# Altium PCB STM32board_pcb.PcbDoc
Units mm, origin at the board's own origin, x right, y up, seen from the top; angles counter-clockwise.
Board outline 33.5 x 33.5 mm, 4 copper layers (L1 (Signal), L2 (GND), L3 (GND), L4 (Signal)), stack 1.57 mm thick; 35 components, 27 nets, 170 pads, 67 vias.
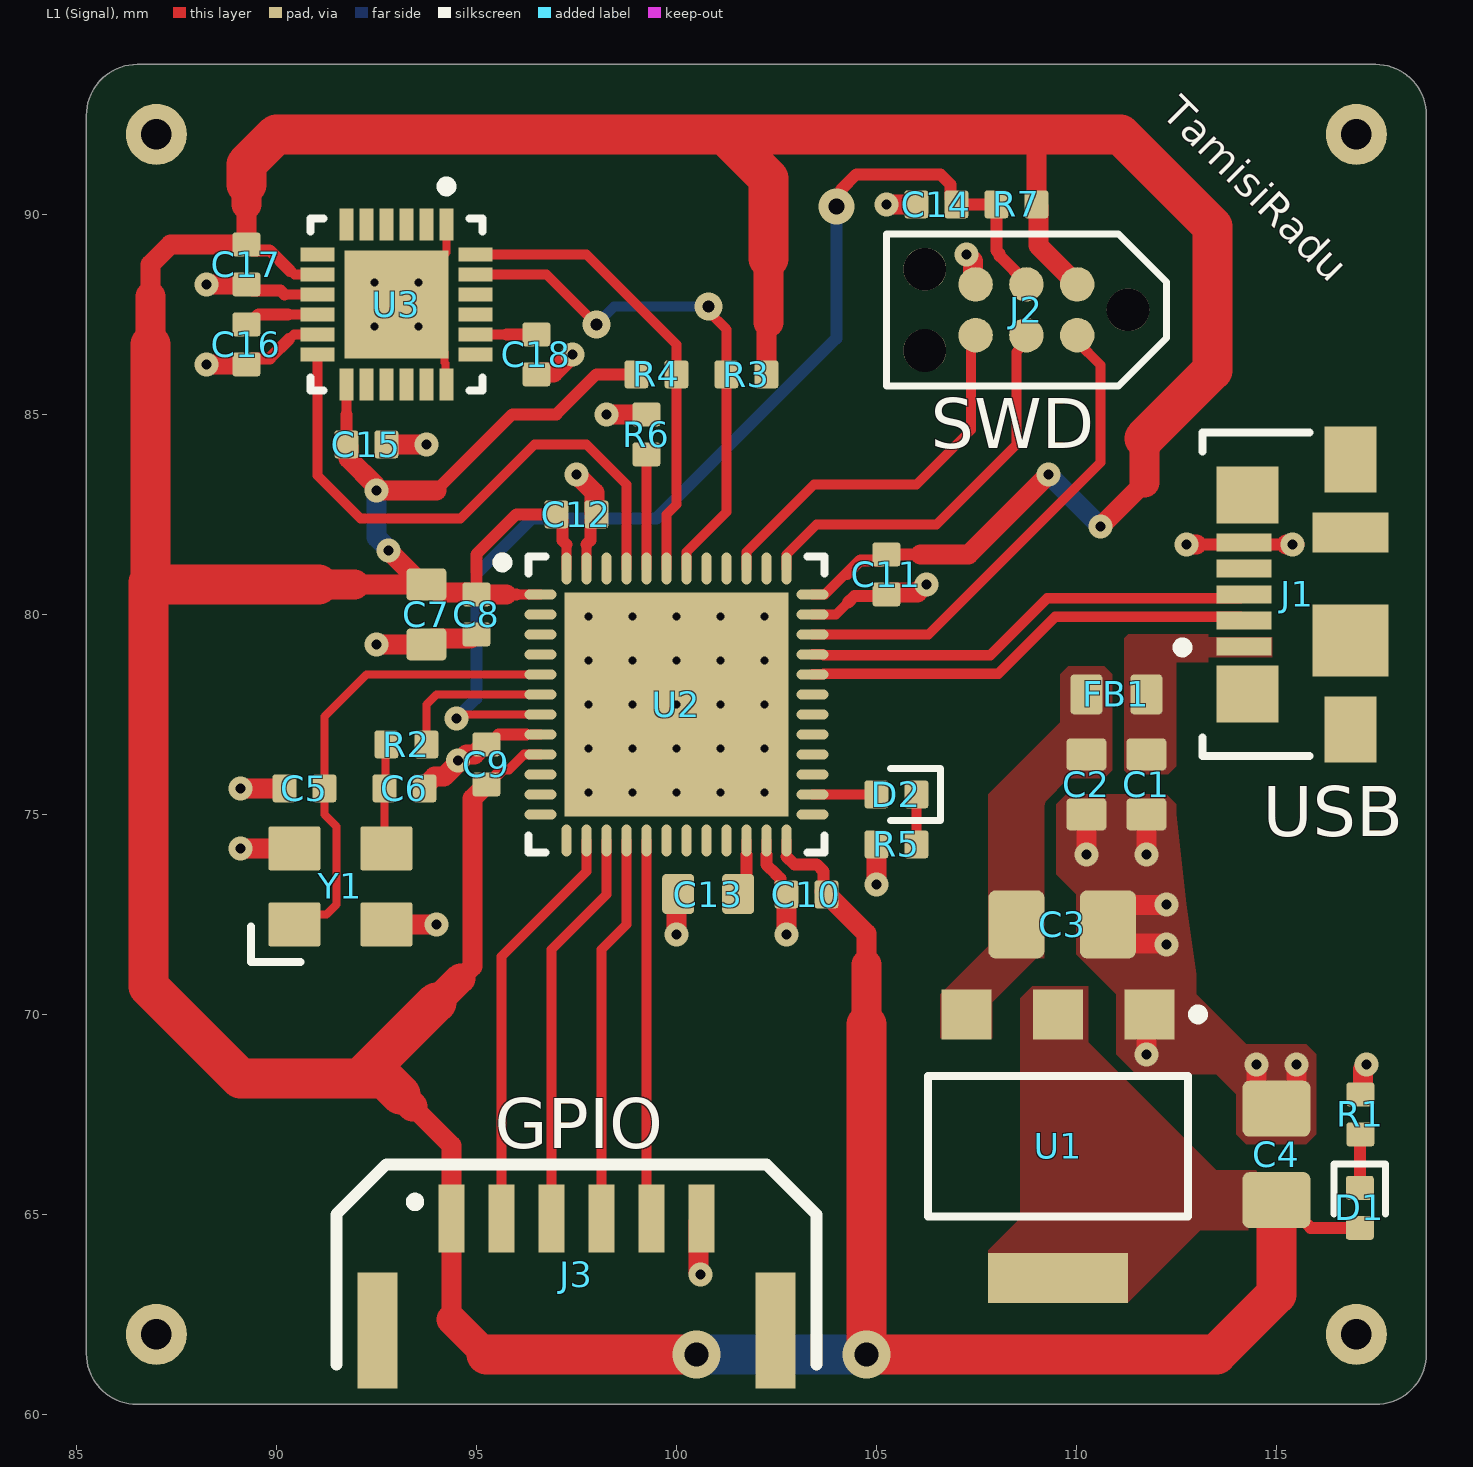
[diagram p0: L1 (Signal) view]
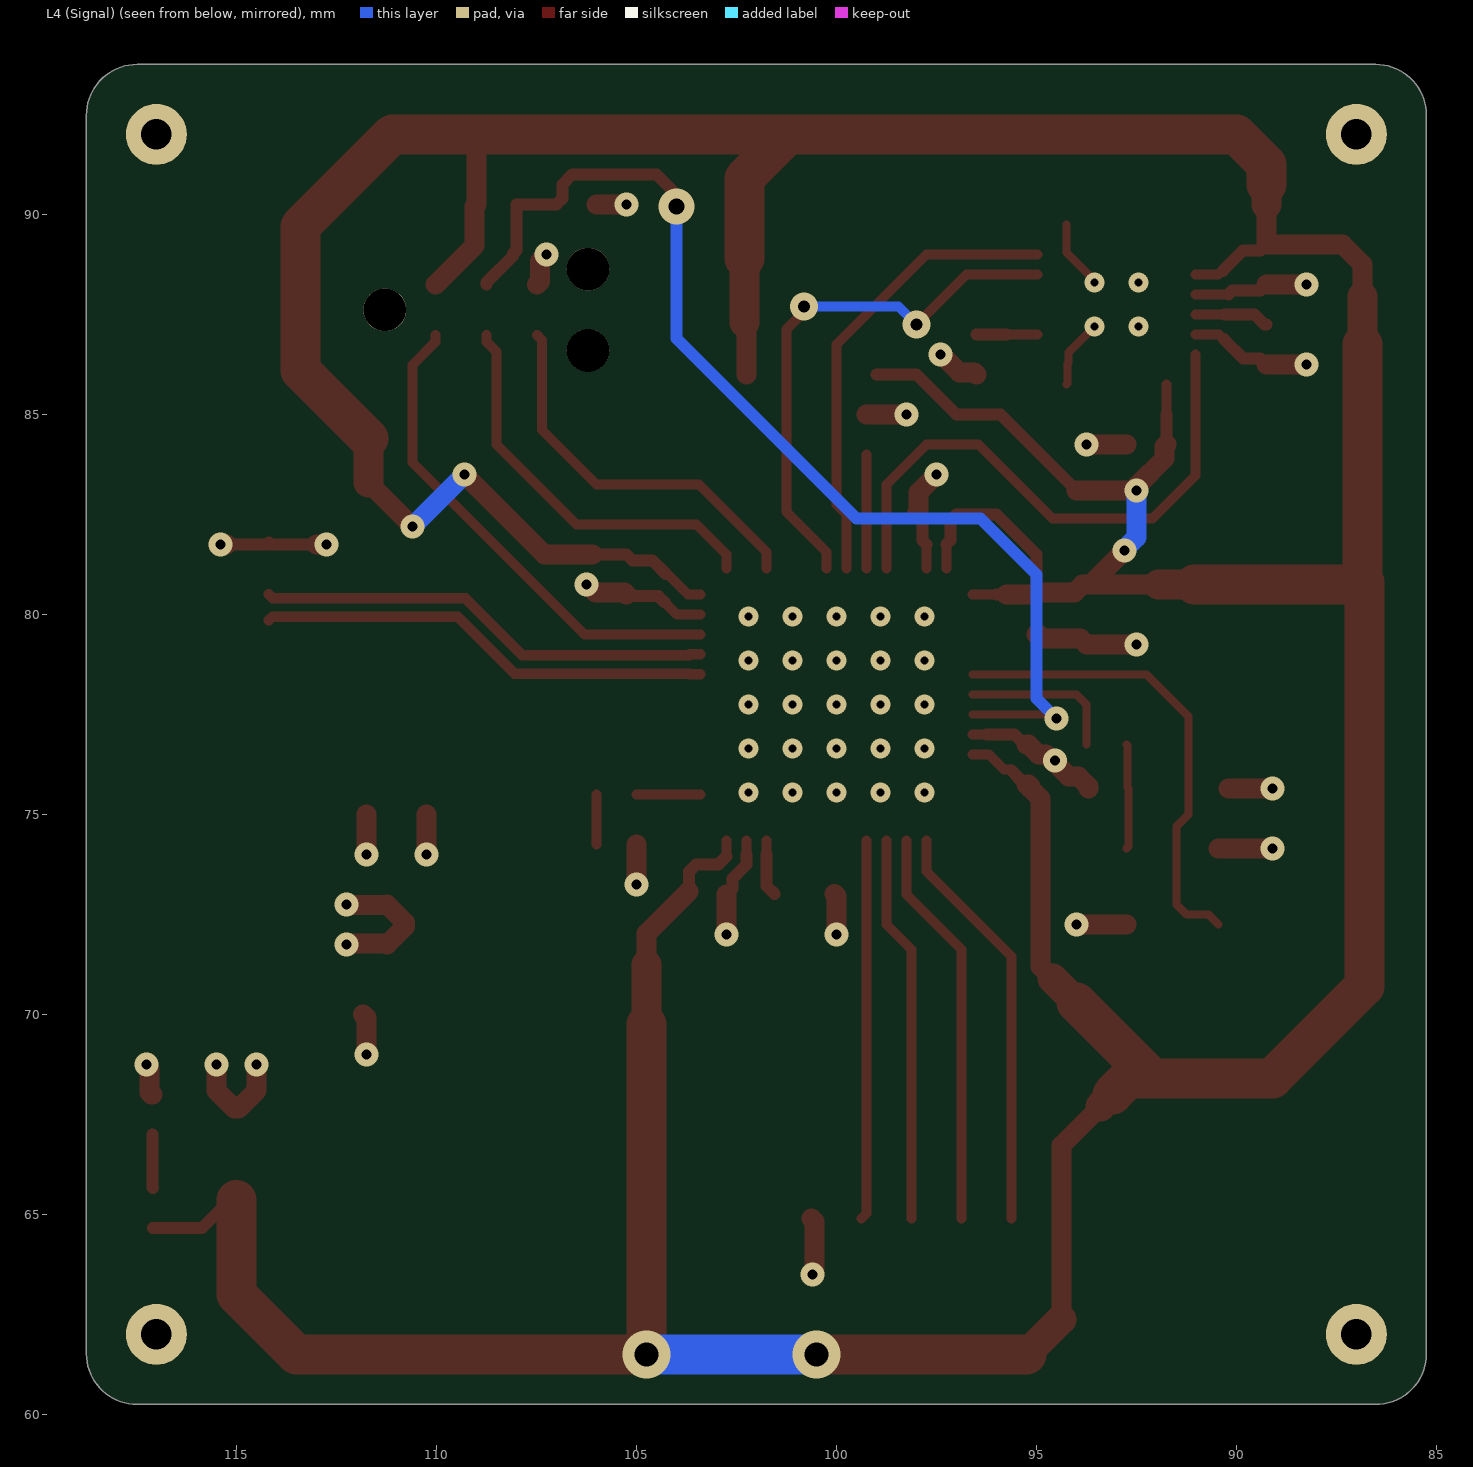
[diagram p1: L4 (Signal) view, seen from below]
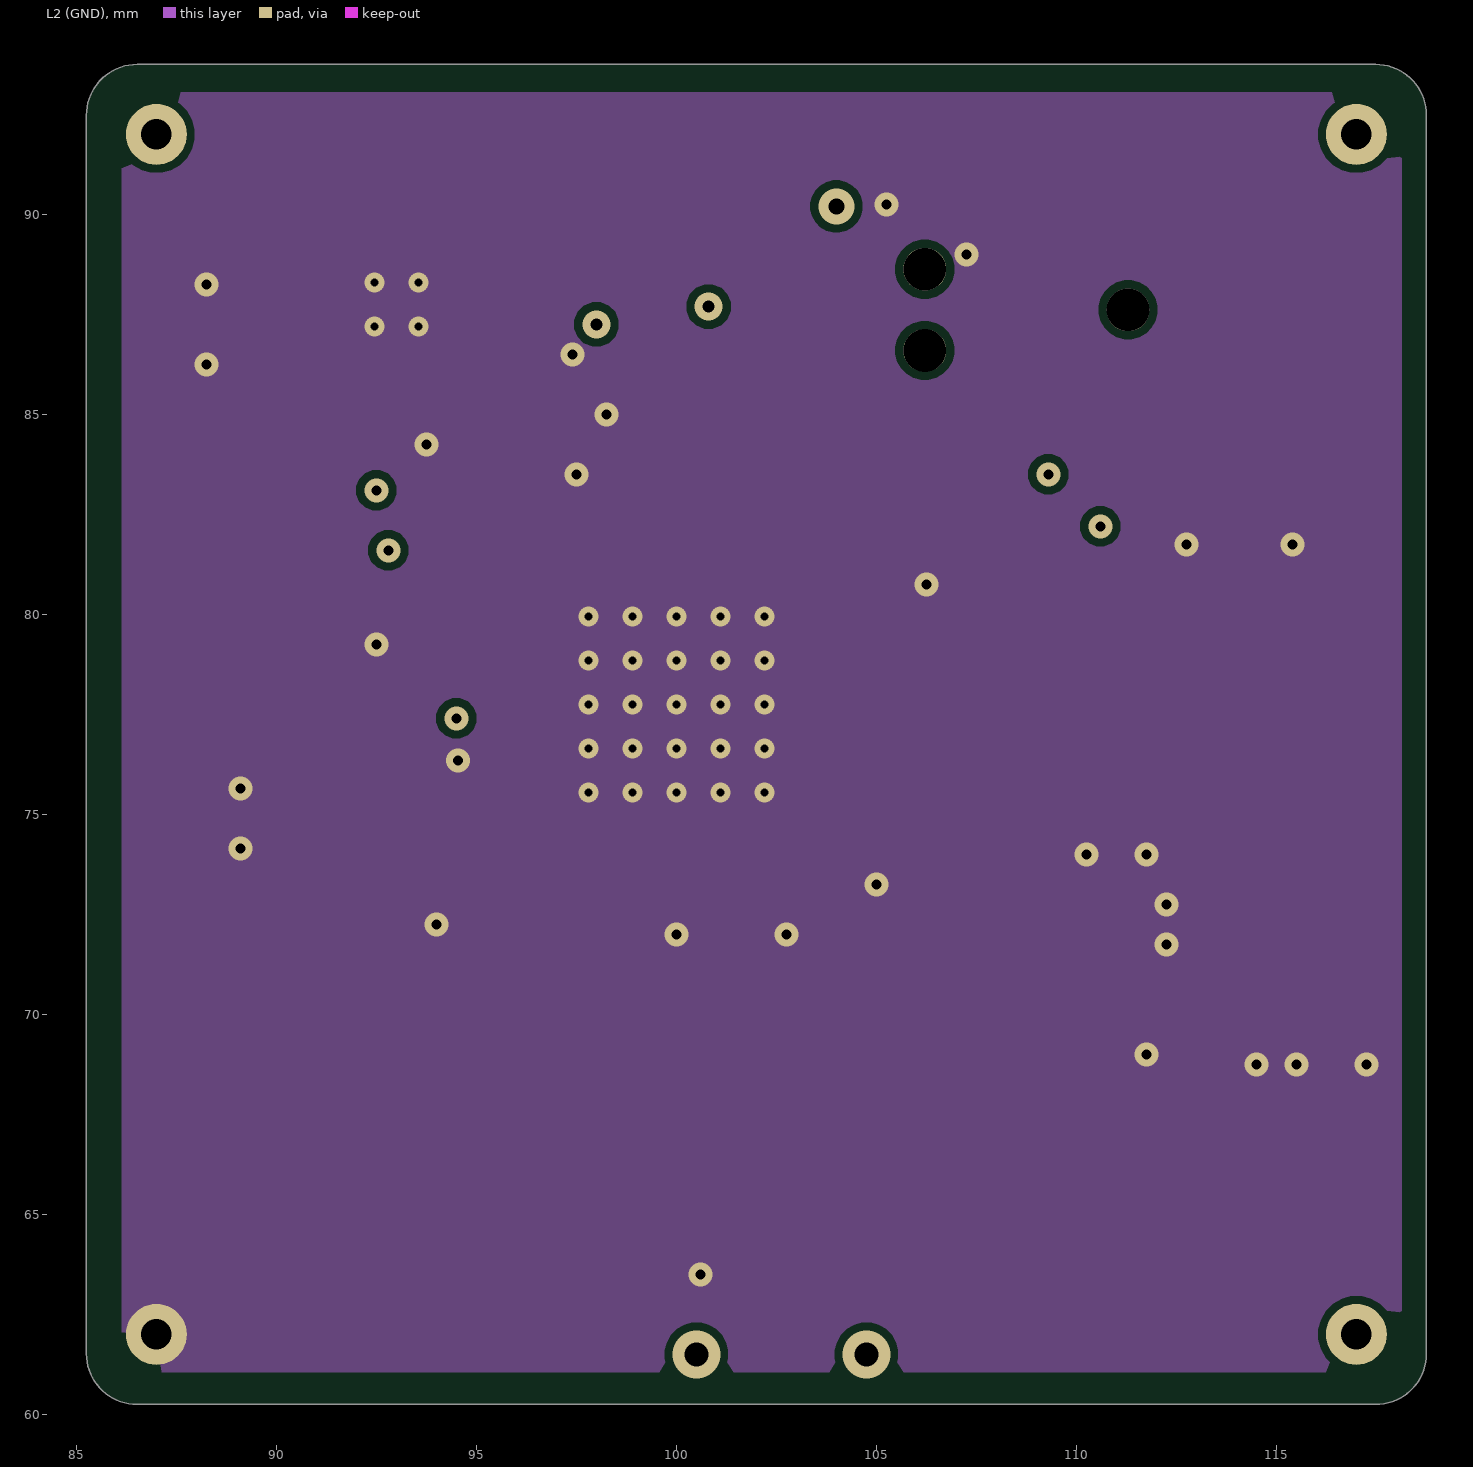
[diagram p2: L2 (GND)]
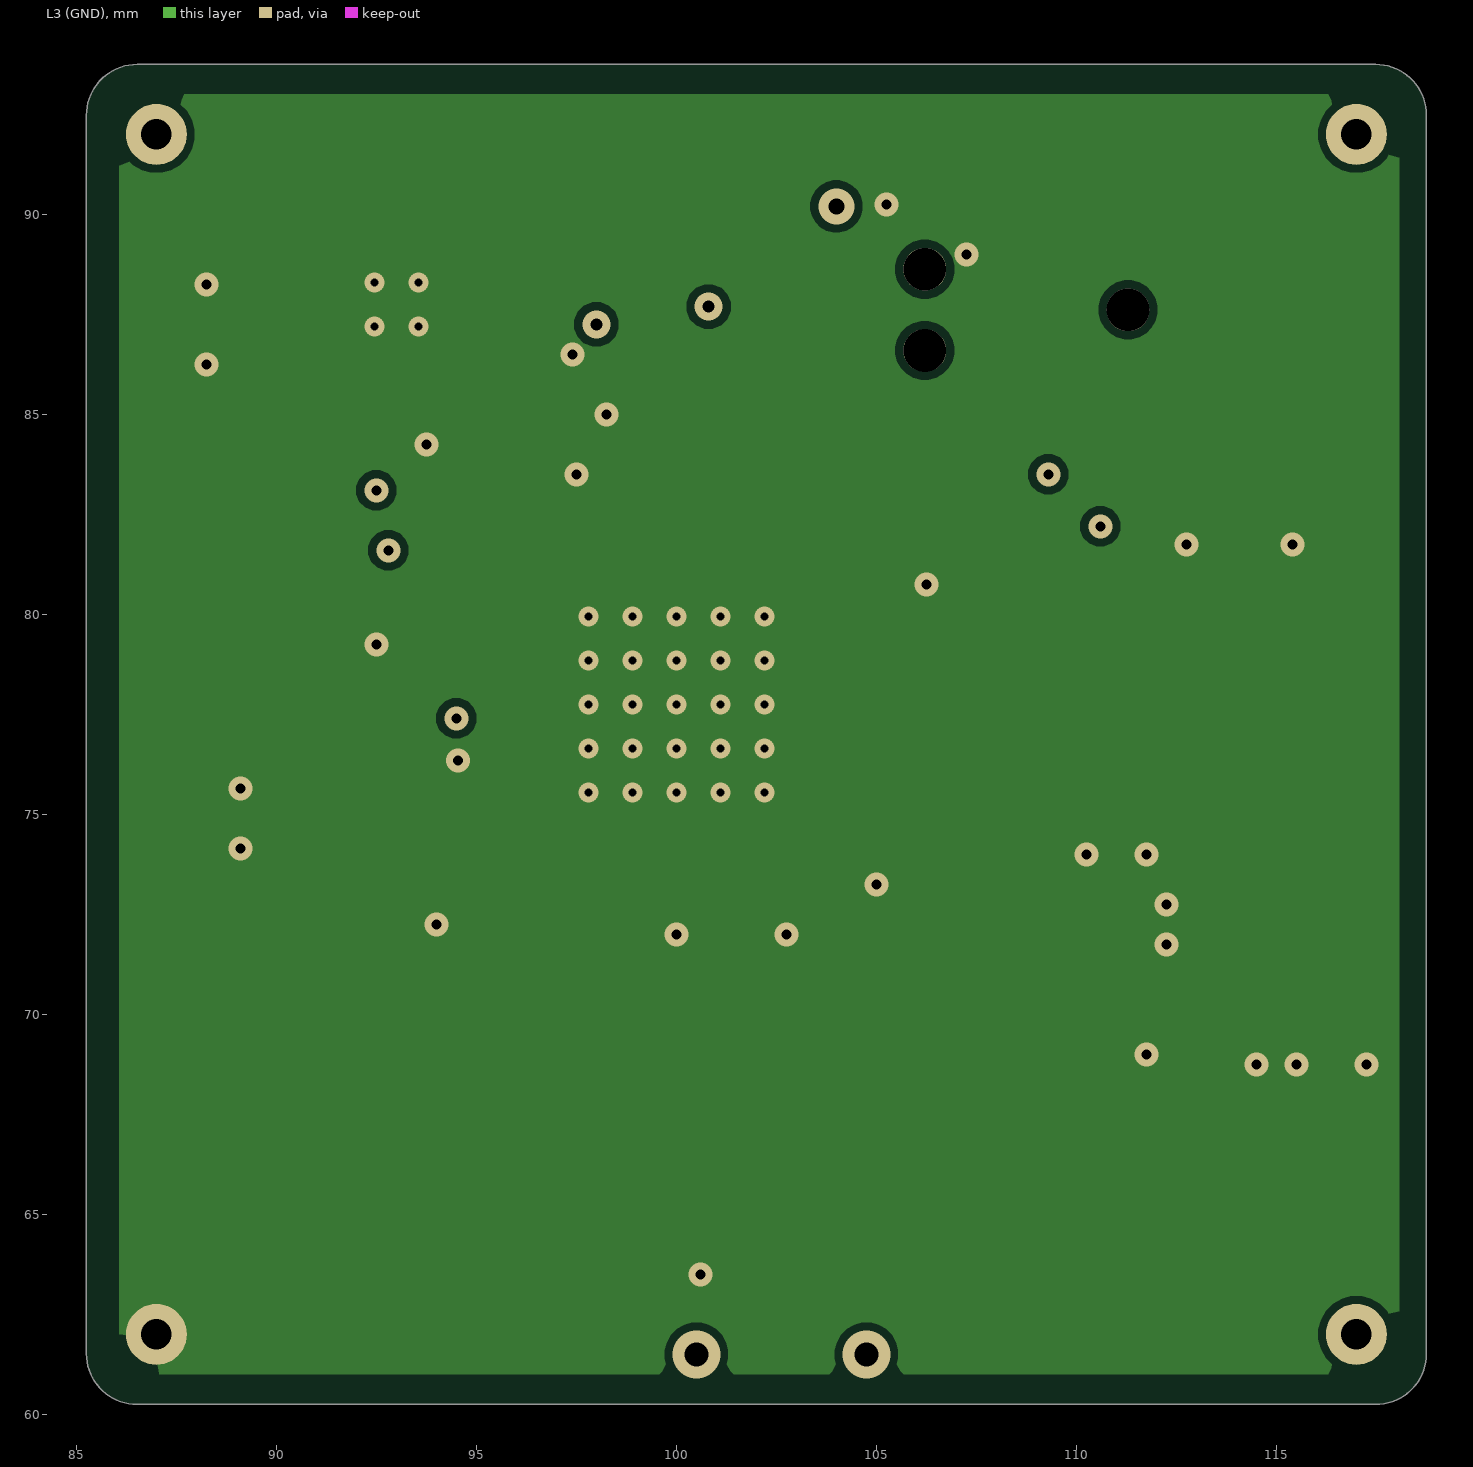
[diagram p3: L3 (GND)]
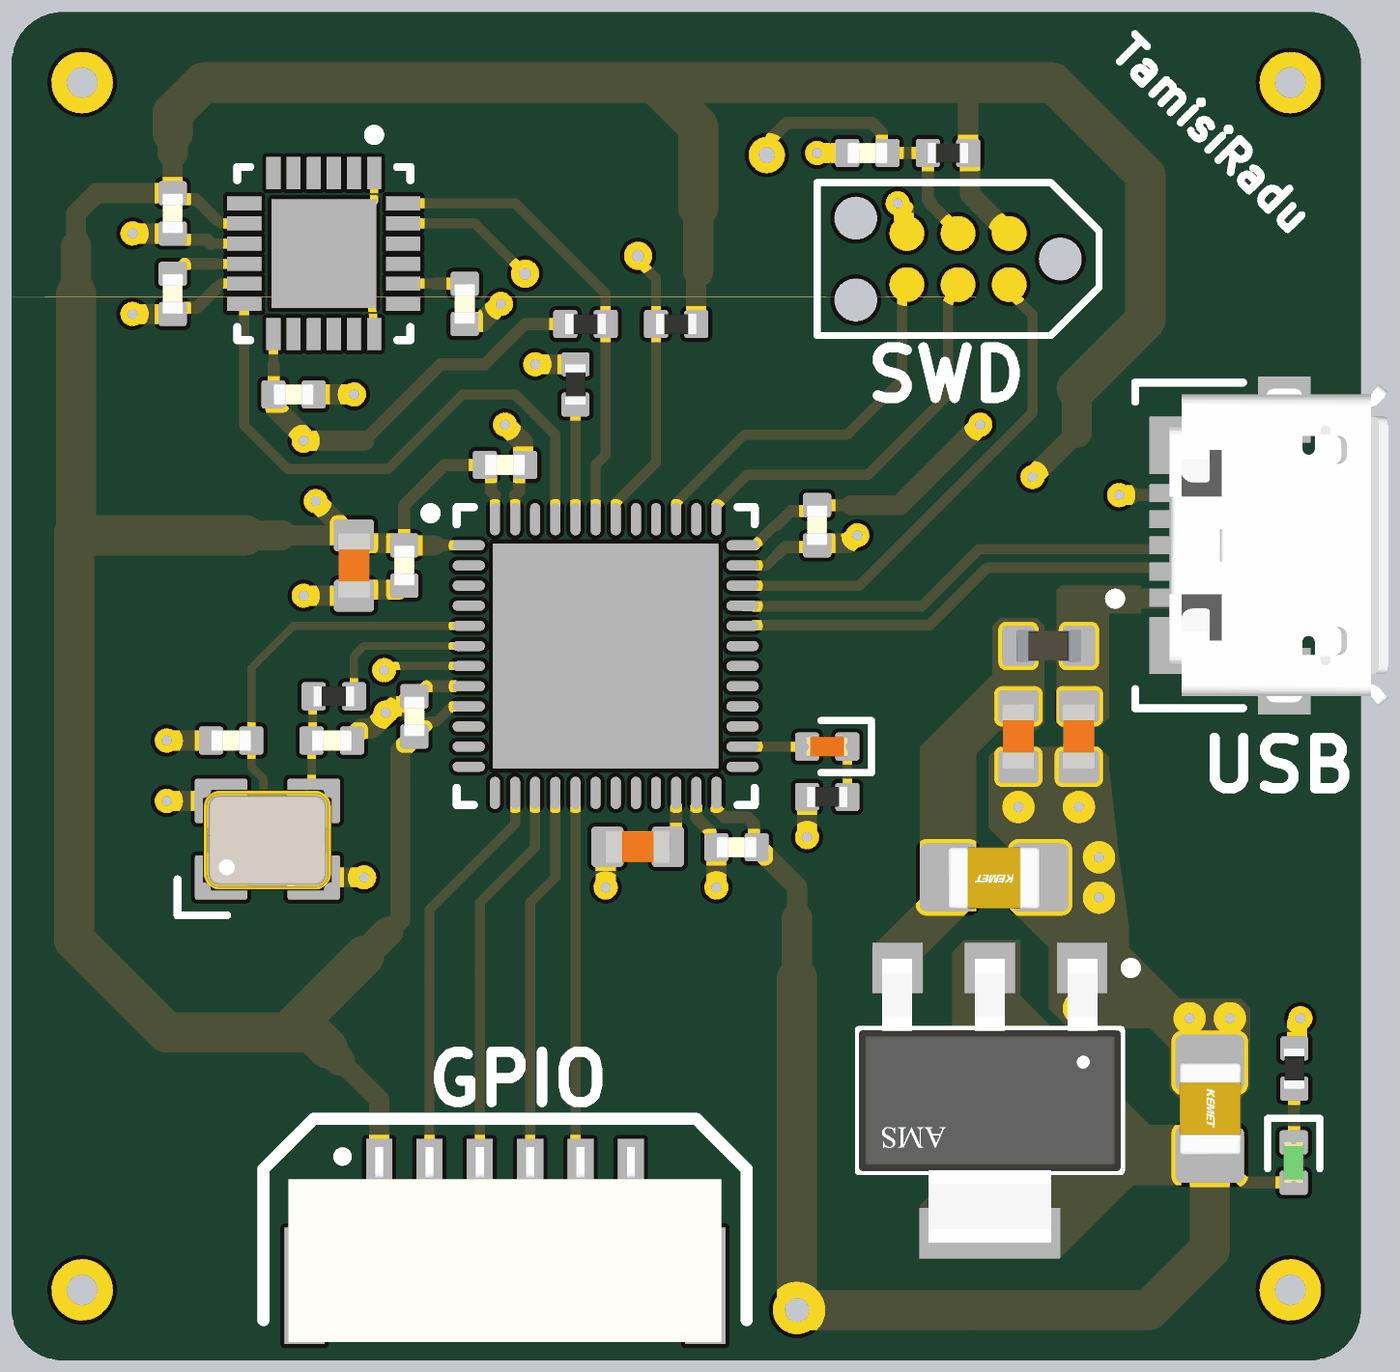
[diagram p4: 3D render of the assembled board from above, using the file's embedded part models]

## Layer stack, top to bottom
Top Solder: solder mask 0.0254, SM-001, Dk 4
L1 (Signal): signal copper 0.035
Dielectric 1: prepreg 0.2, PP-017, Dk 4.6
L2 (GND): signal copper 0.0175
Dielectric 3: core 1.065, Core-039, Dk 4.6
L3 (GND): signal copper 0.0175
Dielectric 5: prepreg 0.2, PP-017, Dk 4.6
L4 (Signal): signal copper 0.035
Bottom Solder: solder mask 0.0254, SM-001, Dk 4

## Board outline
85.25,61.52 85.25,92.48 cw(c86.52,92.48) 86.52,93.75 117.48,93.75 cw(c117.48,92.48) 118.75,92.48 118.75,61.52 cw(c117.48,61.52) 117.48,60.25 86.52,60.25 cw(c86.52,61.52)

## Design rules (kind name [scope] priority, off if disabled: settings)
Clearance [All] p1: gap=0.2 ignorepadtopadclearanceinfootprint=FALSE
DiffPairsRouting [All] p1: maxlimit=0.254 minlimit=0.203 mostfreqgap=0.254 toplayer_maxgap=0.203 toplayer_prefgap=0.203 toplayer_minwidth=0.26 toplayer_maxwidth=0.26 toplayer_prefwidth=0.26 bottomlayer_maxgap=0.203 bottomlayer_prefgap=0.203 bottomlayer_minwidth=0.26 bottomlayer_maxwidth=0.26 bottomlayer_prefwidth=0.26 impedanceprofiledriven=TRUE impedanceprofileid={F6BA5E5E-0761-4673-AEB8-B15872D27785} impedanceprofilevalue=90.000000 maxuncoupledlength=12.7
PolygonConnect [All] p1: connectstyle=Direct reliefconductorwidth=0.254 reliefentries=4 polygonreliefangle="90 Angle" airgapwidth=0.254
RoutingVias [All] p1: holewidth=0.3 width=0.7 viastyle="Through Hole" minholewidth=0.25 minwidth=0.55 maxholewidth=0.4 maxwidth=0.9
SolderMaskExpansion [All] p1: expansion=0.102 istentingtop=FALSE
SupplyNets "Schematic Supply Nets_3" [InNet('+3V3')] p1: voltage=0.000
SupplyNets "Schematic Supply Nets_2" [InNet('+5')] p2: voltage=0.000
SupplyNets "Schematic Supply Nets_1" [InNet('VBUS')] p3: voltage=0.000
SupplyNets "Schematic Supply Nets" [InNet('GND')] p4: voltage=0.000
UnRoutedNet [All] p1: checkbadconnections=TRUE
Width [All] p1: maxlimit=1 minlimit=0.2 preferedwidth=0.3 midlayer1_minwidth=0.254 midlayer1_maxwidth=0.254 midlayer1_prefwidth=0.254 midlayer2_minwidth=0.254 midlayer2_maxwidth=0.254 midlayer2_prefwidth=0.254 minimp=50.000000 maximp=50.000000 favimp=50.000000
28 further rules are at their usual default settings.

## Classes and differential pairs
net class "Diff USB": USB_D_N USB_D_P
differential pair USB_D: +USB_D_P -USB_D_N

## Components (designator, comment, footprint, x,y, rotation, side; value= is the part's Value field where it differs from the comment)
C1 "2u2" CAP_0603 111.75,75.75 r90 top
C2 "2u2" CAP_0603 110.25,75.75 r90 top
C3 "22u" CAP_0805 109.643,72.25 r180 top
C4 "22u" CAP_0805 115,66.5 r270 top
C5 "10p" CAP_0402 90.7,75.65 r0 top
C6 "10p" CAP_0402 93.2,75.65 r180 top
C7 "2u2" CAP_0603 93.75,80 r90 top
C8 "100n" CAP_0402 95,80 r90 top
C9 "100n" CAP_0402 95.25,76.25 r270 top
C10 "100n" CAP_0402 103.25,73 r0 top
C11 "100n" CAP_0402 105.25,81 r90 top
C12 "100n" CAP_0402 97.5,82.5 r180 top
C13 "2u2" CAP_0603 100.794,73.01 r0 top
C14 "100n" CAP_0402 106.5,90.25 r0 top
C15 "100n" CAP_0402 92.25,84.25 r180 top
C16 "100n" CAP_0402 89.25,86.75 r90 top
C17 "10n" CAP_0402 89.25,88.75 r90 top
C18 "2n2" CAP_0402 96.5,86.5 r90 top
D1 "GREEN" LED_0402_GREEN 117.085,65.165 r90 top
D2 "RED" LED_0402_RED 105.5,75.5 r0 top
FB1 "120R" FB_0603 111,78 r180 top
J1 "473460001" FP-473460001-MFG 116.5,80.5 r90 top
J2 "DNP" TC2030-NL-FP 108.75,87.615 r180 top
J3 "SM06B-GHS-TB" SM06B-GHS-TB 97.5,63.5 r0 top
R1 "1k" RES_0402 117.1,67.5 r270 top
R2 "0R" RES_0402 93.25,76.75 r0 top
R3 "2k2" RES_0402 101.75,86 r0 top
R4 "2k2" RES_0402 99.5,86 r180 top
R5 "1k" RES_0402 105.5,74.25 r0 top
R6 "10k" RES_0402 99.25,84.5 r270 top
R7 "10k" RES_0402 108.5,90.25 r0 top
U1 "AMS1117-3.3" FP-AMS1117-IPC_C 109.54,66.705 r270 top
U2 "STM32F411CEU6" STM-UFQFPN48_L 100,77.75 r0 top
U3 "MPU-6050" IS-QFN-24_V 93,87.75 r270 top
Y1 "24MHz" XTAL_3225 91.6,73.2 r0 top

## Footprints (in the part's own frame and the unit in brackets; to place one, negate y for a bottom-side part, rotate by r counter-clockwise, add the part's x,y. Pads: shape width x height; smd on the part's side, far side on the other; paste and mask are expansions set on the pad)
CAP_0402 [mm]
  rrect25% 0.6x0.7 smd: 1(-0.5,0) 2(0.5,0)
  body extent -0.5,-0.26 0.5,0.26, height 0.37
CAP_0603 [mm]
  rrect25% 0.8x1 smd: 1(-0.75,0) 2(0.75,0)
  body extent -0.8,-0.4 0.8,0.4, height 0.51
CAP_0805 [mm]
  rrect25% 1.4x1.7 smd: 1(-1.143,0) 2(1.143,0)
  body extent -1.15,-0.76 1.15,0.79, height 1.01
FB_0603 [mm]
  rrect25% 0.8x1 smd: 1(-0.75,0) 2(0.75,0)
  body extent -0.8,-0.4 0.8,0.4, height 0.81
FP-473460001-MFG [mm]
  rect 0.45x1.38 smd paste+0 mask+0: 1(-1.3,2.31) 2(-0.65,2.31) 3(0,2.31) 4(0.65,2.31) 5(1.3,2.31)
  rect 1.425x1.55 smd paste+0 mask+0: 6(-2.488,2.225) 7(2.488,2.225)
  rect 1.65x1.3 smd paste+0 mask+0: 8(-3.375,-0.35) 11(3.375,-0.35)
  rect 1.8x1.9 smd paste+0 mask+0: 9(-1.15,-0.35)
  rect 1x1.9 smd paste+0 mask+0: 10(1.55,-0.35)
  silkscreen extent -4.05,0.67 4.05,3.97, body extent -4.3,-2.48 4.3,3.45, height 0.25
FP-AMS1117-IPC_C [mm]
  rect 1.25x1.25 smd paste+0 mask+0: 1(-3.295,2.29) 2(-3.295,0) 3(-3.295,-2.29)
  rect 1.25x3.5 smd paste+0 mask+0: 4(3.295,0)
  silkscreen extent -3.42,-3.25 1.75,3.63, body extent -3.53,-3.25 3.53,3.25, height 1.8
IS-QFN-24_V [mm] "QFN, 24-Leads, Body 4x4mm, Pitch 0.5mm, Thermal Pad 2.7x2.6mm"
  rect 0.8x0.35 smd: 1(-2,1.25) 2(-2,0.75) 3(-2,0.25) 4(-2,-0.25) 5(-2,-0.75) 6(-2,-1.25) 13(2,-1.25) 14(2,-0.75) 15(2,-0.25) 16(2,0.25) 17(2,0.75) 18(2,1.25)
  rect 0.35x0.85 smd mask+0.102: 7(-1.25,-1.975) 8(-0.75,-1.975) 9(-0.25,-1.975) 10(0.25,-1.975) 11(0.75,-1.975) 12(1.25,-1.975) 19(1.25,1.975) 20(0.75,1.975) 21(0.25,1.975) 22(-0.25,1.975) 23(-0.75,1.975) 24(-1.25,1.975)
  rect 2.7x2.6 smd: 25(0,0)
  silkscreen extent -3.07,-2.15 2.15,2.15, body extent -2,-2 2,2, height 0.95
LED_0402_GREEN [mm]
  rrect25% 0.6x0.7 smd: A(-0.5,0) K(0.5,0)
  silkscreen extent -0.15,-0.65 1.1,0.65, body extent -0.51,-0.25 0.51,0.25, height 0.45
LED_0402_RED [mm]
  rrect25% 0.6x0.7 smd: A(-0.5,0) K(0.5,0)
  silkscreen extent -0.15,-0.65 1.1,0.65, body extent -0.51,-0.25 0.51,0.25, height 0.45
RES_0402 [mm]
  rrect25% 0.6x0.7 smd: 1(-0.5,0) 2(0.5,0)
  body extent -0.5,-0.25 0.5,0.25, height 0.3
SM06B-GHS-TB [mm]
  rect 0.65x1.7 smd: 1(-3.125,1.4) 2(-1.875,1.4) 3(-0.625,1.4) 4(0.625,1.4) 5(1.875,1.4) 6(3.125,1.4)
  rect 1x2.9 smd: ""(-4.975,-1.4) ""(4.975,-1.4)
  silkscreen extent -6,-2.25 6,2.75, body extent -5.38,-2.8 5.38,2.05, height 4.26
STM-UFQFPN48_L [mm] "QFN, 48-Leads, Body 7.1x7.1mm, Pitch 0.5mm, Thermal Pad 5.6x5.6mm, IPC High Density"
  oval 0.8x0.25 smd: 1(-3.4,2.75) 2(-3.4,2.25) 3(-3.4,1.75) 4(-3.4,1.25) 5(-3.4,0.75) 6(-3.4,0.25) 7(-3.4,-0.25) 8(-3.4,-0.75) 9(-3.4,-1.25) 10(-3.4,-1.75) 11(-3.4,-2.25) 12(-3.4,-2.75) 25(3.4,-2.75) 26(3.4,-2.25) 27(3.4,-1.75) 28(3.4,-1.25) 29(3.4,-0.75) 30(3.4,-0.25) 31(3.4,0.25) 32(3.4,0.75) 33(3.4,1.25) 34(3.4,1.75) 35(3.4,2.25) 36(3.4,2.75)
  oval 0.25x0.8 smd: 13(-2.75,-3.4) 14(-2.25,-3.4) 15(-1.75,-3.4) 16(-1.25,-3.4) 17(-0.75,-3.4) 18(-0.25,-3.4) 19(0.25,-3.4) 20(0.75,-3.4) 21(1.25,-3.4) 22(1.75,-3.4) 23(2.25,-3.4) 24(2.75,-3.4) 37(2.75,3.4) 38(2.25,3.4) 39(1.75,3.4) 40(1.25,3.4) 41(0.75,3.4) 42(0.25,3.4) 43(-0.25,3.4) 44(-0.75,3.4) 45(-1.25,3.4) 46(-1.75,3.4) 47(-2.25,3.4) 48(-2.75,3.4)
  rect 5.6x5.6 smd: 49(0,0)
  silkscreen extent -4.47,-3.7 3.7,3.7, body extent -3.55,-3.55 3.55,3.55, height 0.6
TC2030-NL-FP [mil]
  round 33.98 smd paste-16.99: 1(-50,-25) 2(-50,25) 3(0,-25) 4(0,25) 5(50,-25) 6(50,25)
  round 42.01 hole 42.01 unplated: MH(-100,0) MH(100,-40) MH(100,40)
  silkscreen extent -138,-75 138,75
XTAL_3225 [mm]
  rrect10% 1.3x1.1 smd: 1(-1.15,-0.95) 2(1.15,-0.95) 3(1.15,0.95) 4(-1.15,0.95)
  silkscreen extent -2.23,-1.89 -1,-1, body extent -1.6,-1.28 1.6,1.22, height 0.61

## Part data
C1 C2 C7 C13: library part CAP_0603, "Capacitor SMD 0603"
C3 C4: library part CAP_0805, "Capacitor SMD 0805"
C5 C6 C8 C9 C10 C11 C12 C14 C15 C16 C17 C18: library part CAP_0402, "Capacitor SMD 0402"
D1: library part LED_0402_GREEN, "LED 0402 GREEN SMD"
D2: library part LED_0402_RED, "LED 0402 RED SMD"
FB1: library part FB_0603, "Ferrite Bead SMD 0603"
J1: library part CMP-2000-05246-2, "CONN RCPT USB2.0 MICRO B SMD R/A", Current Rating=1.8A, Manufacturer=Molex, Package=0, Temperature="-30°C to +85°C", Temperature Range High=+85°C, Temperature Range Low=-30°C, Voltage Rating=30V, Automotive=No, Category=Conn, ComponentLink2Description=Datasheet, ComponentLink2URL=https://www.molex.com/webdocs/datasheets/pdf/en-us/0473460001_IO_CONNECTORS.pdf, Conn Orientation="Right Angle", Contact Material=Gold,Nickel, Device Class L1=Connectors, Device Class L2="USB Connectors", Device Class L3=unset, Digikey Description="CONN RCPT USB2.0 MICRO B SMD R/A", Footprint Url=https://www.molex.com/pdm_docs/sd/473460001_sd.pdf, Height=2.945mm, Is Female=yes, Lead Free=Yes, Manufacturer Part Number=473460001, Number Of Contacts=5, Octopart=https://octopart.com/47346-0001-molex-7164928, Pitch=0.65mm, RoHS=TRUE, Shielding=true, Usb Standard="USB 2.0"
J2: library part TC2030-NL, "Tag-Connect No-Solder SWD Debug Connector (No Legs) DO NOT PLACE", Manufacturer=Tag-Connect, Manufacturer Part Number=TC2030-NL-FP
J3: "Header Connector 6 Position 1.25MM Pitch SMD Horizontal JST GH", Manufacturer=JST, Manufacturer Part Number=SM06B-GHS-TB
R1 R2 R3 R4 R5 R6 R7: library part RES_0402, "Resistor SMD 0402"
U1: library part CMP-209535-000001-1, "LDO Voltage Regulators 1A, 3.3V", Dropout Voltage=1.1V, Manufacturer="Advanced Monolithic Systems", Max Junction Temp=+125°C, Max Power Dissipation=1.2W, Max Supply Voltage=15V, Nominal Supply Current=5mA, Output Current=1A, Output Voltage=3.3V, Package=AMS1117, Temperature="-40°C to +125°C", Temperature Range Low=-40°C, Automotive=No, Category=IC, ComponentLink2Description=Datasheet, ComponentLink2URL=http://www.advanced-monolithic.com/pdf/ds1117.pdf, Device Class L1="Integrated Circuits (ICs)", Device Class L2="Power Management ICs", Device Class L3="Voltage Regulators - Linear", Height=1.8mm, Ipc Land Pattern Name=SOT229P700X180-4, Lead Free=Yes, Manufacturer Part Number=AMS1117-3.3, Number Of Outputs=1, Octopart=https://octopart.com/ams1117-3.3-advanced+monolithic+systems-25899300, Output Type=Fixed, RoHS=TRUE, Standoff Height=0.64mm, Temperature Range High=+125°C
U2: library part CMP-0243-00165-1, "ARM Cortex-M4 32-bit MCU+FPU, 512 KB Flash, 128 KB RAM, 36 I/Os, 48-Pin UFQFPN, -40 to 85 degC, Tray", I/Os (High Current)=36, Operating Frequency(F) (Processor speed) (MHz)=100, Package Description=UFQFPN48, Package Reference="48-Pin Ultra Thin Fine Pitch Quad Flat No-Lead, 7 x 7 x 0.6 mm Body, 0.5 mm Pitch, Exposed Pad", Supply Voltage(Vcc) min (V)=1.7, ComponentLink1Description="Manufacturer URL", ComponentLink1URL=http://www.st.com/, ComponentLink2Description=Datasheet, ComponentLink2URL=http://www.st.com/st-web-ui/static/active/en/resource/technical/document/datasheet/DM00115249.pdf, Core="ARM Cortex-M4", DatasheetVersion="Rev. 6", FLASH Size (Prog) (kB)=512, Internal RAM Size (kB)=128, Mounting Technology="Surface Mount", Packing=Tray
U3: library part CMP-1753-00002-2, "3-Axis Gyroscope, Accelerometer and a Digital Motion Processor(TM) (DMP), 2.375 to 3.46 V, -40 to 85 degC, 24-Pin QFN, RoHS, Tape and Reel", Manufacturer=InvenSense, Standard Package=5,000, Category=Sensors,Transducers, Datasheet URL=http://datasheet.octopart.com/MPU-6050-InvenSense-datasheet-14421344.pdf, Datasheet Version="Rev. 3.3, 05/2012", Dynamic Catalog=MPU-6000™Series, Family=Multifunction, Featured Product=MPU-60506-Axis,IntegratedI²CSolution, Manufacturer URL=http://www.invensense.com/, Online Catalog=MPU-6000™Series, Other Names="1428-1007-2 / MPU6050", Output Type=Digital, Sensor Type=MotionTracking, Unit PriceUSD=Digital
Y1: library part TSX-3225_24.0000MF15X-AC, "Crystal SMD 24MHz 10PPM 7pF 3225", Manufacturer=Epson, Manufacturer Part Number="TSX-3225 24.0000MF15X-AC"

## Free pads (board coordinates)
  round 1.524 hole 0.762: 1(117,92) 2(117,62) 3(87,62) 4(87,92)

## Via types
v1: diameter 0.6, hole 0.25, L1 (Signal) to L4 (Signal), 33 vias
v2: diameter 0.5, hole 0.2, L1 (Signal) to L4 (Signal), 29 vias
v3: diameter 1.2, hole 0.6, L1 (Signal) to L4 (Signal), 2 vias
v4: diameter 0.7, hole 0.3, L1 (Signal) to L4 (Signal), 2 vias
v5: diameter 0.9, hole 0.4, L1 (Signal) to L4 (Signal), 1 vias

## Nets (pads, with @x,y where several pads share a name; then routed paths per layer and width w, separated by ;. In a path a pad name is that pad's centre, name@x,y a point inside that pad or via, vN(x,y) a via of type N, cw(c..) or ccw(c..) an arc to the next point about the centre after c; other vN are vias at no path point)
+3V3: C4.2 C7.2 C8.2 C9.2 C10.2 C11.2 C12.2 C15.2 C17.2 D1.A J2.1 J3.1 R3.2 R4.2 R7.2 U1.2 U1.4 U2.1 U2.9 U2.24 U2.36 U2.48 U3.8 U3.13 | length 170.8
  L1 (Signal) w0.25: 90.34,88.59 90.36,88.59 90.45,88.5 U3.8 ; 91.75,85 U3.13 ; 95.626,76.1 95.651,76.125 95.814,76.125 96.189,76.5 U2.9 ; 96,80.5 U2.1 ; U2.48 97.25,81.75 ; 102.75,73.949 U2.24 ; U2.36 103.709,80.5 104.221,81.012 104.262,81.012
  L1 (Signal) w0.3: C17.2 89.4,89.1 89.83,89.1 90.34,88.59 ; C15.2 91.75,85 ; 94,83.1 95.9,85 97,85 98,86 R4.2 ; C8.2 95,81.5 96,82.5 C12.2 97.15,82.35 97.15,81.85 97.25,81.75 ; C9.2@95.3,75.75 95.45,75.9 95.45,75.924 95.626,76.1 ; 95.75,80.5 96,80.5 ; 102.75,73.949 102.949,73.75 103.506,73.75 103.682,73.574 C10.2@103.682,73.068 ; 104.262,81.012 104.6,81.35 105.1,81.35 C11.2 106.1,81.5 ; C4.2 115.164,65.357 115.855,64.665 D1.A
  L1 (Signal) w0.5: 86.85,87.95 86.85,88.75 87.35,89.25 C17.2 89.25,90.25 ; C15.2 91.8,84.2 91.8,83.9 92.481,83.219 92.481,83.119 v1(92.5,83.1) 94,83.1 ; 91.95,80.75 C7.2@93.65,80.75 ; v1(92.8,81.6) C7.2@93.65,80.75 ; 93.4,67.7 94.375,66.725 J3.1 94.375,62.375 ; C7.2 C7.2@93.65,80.75 ; C7.2@93.85,80.75 94.05,80.55 94.95,80.55 C8.2 95.75,80.5 ; 94.6,70.9 94.9,71.2 94.9,75.4 95.15,75.65 95.15,75.7 95.2,75.75 C9.2 ; R3.2 102.25,87.25 102.3,87.3 ; C10.2@103.7,73.068 104.75,72.018 104.75,71.25 ; 106.1,81.5 107.3,81.5 v1(109.3,83.5) ; 109,92 R7.2 109.05,90.2 109.05,89.22 J2.1 ; v1(110.6,82.2) 111.7,83.3
  L1 (Signal) w0.75: 86.85,86.75 86.85,87.95 ; 89.25,90.25 89.25,90.75 ; 91.05,80.75 91.95,80.75 ; 93.1,68 93.4,67.7 ; 94,70.3 94.6,70.9 ; 94.375,62.375 95.25,61.5 ; 102.3,87.3 102.3,88.9 ; 104.75,69.75 104.75,71.25 ; 111.7,83.3 111.7,84.4
  L1 (Signal) w1: 86.85,86.75 86.85,80.75 ; 89.25,90.75 89.25,91.25 90,92 101.2,92 ; 91.05,80.75 86.85,80.75 ; 93.1,68 92.7,68.4 92.2,68.4 ; 94,70.3 92.2,68.5 92.2,68.4 ; 95.25,61.5 v3(100.5,61.5) ; 102.3,88.9 102.3,90.9 101.2,92 ; 104.75,69.75 v3(104.75,61.5) 113.5,61.5 115,63 C4.2 ; 111.7,84.4 113.4,86.1 113.4,89.7 111.1,92 101.2,92 ; 86.85,80.75 86.8,80.8 86.8,70.7 89.1,68.4 92.2,68.4
  L4 (Signal) w0.5: v1(92.5,83.1) 92.5,81.927 92.8,81.627 v1(92.8,81.6) ; v1(109.3,83.5) v1(110.6,82.2)
  L4 (Signal) w1: v3(100.5,61.5) v3(104.75,61.5)
+5V: C2.2 C3.2 FB1.2 U1.3
GND: C1.1 C2.1 C3.1 C4.1 C5.1 C6.1 C7.1 C8.1 C9.1 C10.1 C11.1 C12.1 C13.1 C14.1 C15.1 C16.1 C17.1 C18.1 J1.5 J2.5 J3.6 pad.3 R1.1 R5.1 R6.1 U1.1 U2.8 U2.23 U2.35 U2.47 U2.49 U3.1 U3.9 U3.11 U3.18 U3.25 Y1.2 Y1.4 | length 48.5
  L1 (Signal) w0.2: v2(93.55,87.2) 94.2,86.55 94.2,86.299 94.225,86.274 94.225,85.775 U3.18 ; U3.25@93.55,88.35 94.25,89.05 U3.1
  L1 (Signal) w0.25: 90.2,88 U3.9 ; 90.316,86.879 90.436,87 U3.11 ; U2.8@96.25,77 U2.8 ; U2.47 97.75,81.75 ; U2.23@102.25,74 U2.23 ; U2.35 103.992,80 104.29,80.298
  L1 (Signal) w0.3: C16.1 89.4,86.4 89.836,86.4 90.316,86.879 ; C17.1 89.4,88.1 90.1,88.1 90.2,88 ; C9.1@95.3,76.75 95.554,77.004 U2.8@96.246,77.004 ; 97.75,81.75 97.85,81.85 97.85,82.35 C12.1 ; U2.23@102.25,74 102.25,73.742 102.492,73.5 102.6,73.392 102.6,73.15 C10.1 ; 104.29,80.298 104.45,80.458 105.208,80.458 C11.1 ; v1@113,81.75 114.14,81.75 J1.5 114.24,81.75 v1@115.25,81.75
  L1 (Signal) w0.5: v1(88.25,86.25) C16.1 ; v1(88.25,88.25) C17.1 ; v1(89.1,74.15) Y1.4 ; v1(89.1,75.65) C5.1 ; v1(92.5,79.25) C7.1 93.9,79.4 94.85,79.4 94.95,79.5 C8.1 ; Y1.2 v1(94,72.25) ; C15.1 v1(93.75,84.25) ; C6.1 93.7,75.7 93.95,75.95 94.192,75.95 94.5,76.258 94.5,76.283 94.535,76.318 v1(94.535,76.345) 94.603,76.345 94.758,76.5 94.95,76.5 95.2,76.75 C9.1 ; C18.1 96.55,86.05 96.923,86.05 97.373,86.5 v1(97.4,86.5) ; v1(97.5,83.5) 97.95,83.05 97.95,82.55 C12.1 ; v1(98.25,85) R6.1 ; v1(100,72) 100,72.966 C13.1 ; v1(100.6,63.5) 100.55,63.55 100.55,64.825 J3.6 ; v1(102.75,72) C10.1 ; v1(105,73.25) R5.1 ; C11.1 105.3,80.55 106.023,80.55 106.223,80.75 v1(106.25,80.75) ; v1(105.25,90.25) C14.1 ; v1(107.25,89) 107.411,88.839 107.411,88.319 J2.5 ; v1(110.25,74) C2.1 ; v1(111.75,69) 111.75,69.92 U1.1 ; v1(111.75,74) C1.1 ; v1(112.25,71.75) 112.231,71.769 111.236,71.769 111.236,71.75 110.786,72.2 C3.1 110.786,72.3 111.236,72.75 111.236,72.731 112.231,72.731 v1(112.25,72.75) ; v1(112.75,81.75) v1@113,81.75 ; v1(114.5,68.75) 114.5,68.093 114.95,67.643 C4.1 115.05,67.643 115.5,68.093 v1(115.5,68.75) ; v1@115.25,81.75 v1(115.4,81.75) v1@115.45,81.75 ; R1.1 117.119,68 117.169,68.05 117.169,68.642 117.25,68.723 v1(117.25,68.75)
  other v2: 97.8,75.55 98.9,75.55 100,75.55 101.1,75.55 102.2,75.55 97.8,76.65 98.9,76.65 100,76.65 101.1,76.65 102.2,76.65 97.8,77.75 98.9,77.75 100,77.75 101.1,77.75 102.2,77.75 97.8,78.85 98.9,78.85 100,78.85 101.1,78.85 102.2,78.85 97.8,79.95 98.9,79.95 100,79.95 101.1,79.95 102.2,79.95 92.45,87.2 92.45,88.3 93.55,88.3
IMU_CPOUT: C18.2 U3.20 | length 1.5
  L1 (Signal) w0.25: U3.20 95.75,87
  L1 (Signal) w0.3: 95.75,87 C18.2
IMU_INT: U2.45 U3.12 | length 14.5
  L1 (Signal) w0.25: U3.12 91.025,83.475 92.1,82.4 94.6,82.4 96.45,84.25 97.75,84.25 98.75,83.25 U2.45
IMU_REGOUT: C16.2 U3.10 | length 1.9
  L1 (Signal) w0.25: 90.294,87.5 U3.10
  L1 (Signal) w0.3: C16.2 89.3,87.25 89.55,87.5 90.294,87.5
IMU_SCL: R3.1 U2.42 U3.23 | length 13.7
  L1 (Signal) w0.25: U3.23 96.75,88.5 v4(98,87.25) ; U2.42 100.25,81.561 101.25,82.561 R3.1 101.25,87.128 100.805,87.573 v4(100.805,87.695)
  L4 (Signal) w0.25: v4(98,87.25) 98.445,87.695 v4(100.805,87.695)
IMU_SDA: R4.1 U2.43 U3.24 | length 11.7
  L1 (Signal) w0.25: U3.24 97.75,89 99.5,87.25 100,86.75 R4.1 100,82.75 99.75,82.5 U2.43
LED_PWR_K: D1.K R1.2 | length 1.3
  L1 (Signal) w0.3: D1.K 117.093,65.673 117.093,66.993 R1.2
MCU_BOOT0: R6.2 U2.44 | length 2.8
  L1 (Signal) w0.25: U2.44 R6.2
MCU_LED_A: D2.A U2.26 | length 1.6
  L1 (Signal) w0.25: U2.26 D2.A
MCU_LED_K: D2.K R5.2 | length 1.3
  L1 (Signal) w0.25: R5.2 D2.K
MCU_NRST: C14.2 J2.3 R7.1 U2.7 | length 28
  L1 (Signal) w0.2: v1(94.5,77.4) 94.608,77.4 94.708,77.5 U2.7
  L1 (Signal) w0.3: v5(104,90.2) 104.115,90.315 104.115,90.615 104.5,91 106.6,91 106.854,90.746 106.854,90.396 C14.2 R7.1 108,89.099 108.08,89.019 108.08,88.967 108.75,88.297 J2.3
  L4 (Signal) w0.3: v1(94.5,77.4) 95,77.9 95,81 96.4,82.4 99.5,82.4 104,86.9 v5(104,90.2)
MCU_OSC_IN: C5.2 U2.5 Y1.1 | length 11.9
  L1 (Signal) w0.2: Y1.1 90.7,72.5 91.25,72.5 91.5,72.75 91.5,74.7 91.2,75 C5.2 91.2,77.45 92.25,78.5 U2.5
MCU_OSC_OUT: R2.2 U2.6 | length 4
  L1 (Signal) w0.2: R2.2 93.75,77.75 94,78 U2.6
MCU_PA4: J3.2 U2.14 | length 10.3
  L1 (Signal) w0.25: J3.2 95.625,71.45 97.75,73.575 U2.14
MCU_PA5: J3.3 U2.15 | length 10
  L1 (Signal) w0.25: J3.3 96.875,71.625 98.25,73 U2.15
MCU_PA6: J3.4 U2.16 | length 9.7
  L1 (Signal) w0.25: J3.4 98.125,71.625 98.75,72.25 U2.16
MCU_PA7: J3.5 U2.17 | length 9.5
  L1 (Signal) w0.25: U2.17 99.25,65.025 J3.5
MCU_SWCLK: J2.4 U2.37 | length 10.1
  L1 (Signal) w0.25: U2.37 102.75,81.5 103.5,82.25 106.5,82.25 108.5,84.25 108.5,86.564 108.75,86.814 J2.4
MCU_SWDIO: J2.2 U2.34 | length 12.4
  L1 (Signal) w0.25: U2.34 106.3,79.5 110.6,83.8 110.6,86.234 110.02,86.814 J2.2
MCU_SWO: J2.6 U2.39 | length 9.7
  L1 (Signal) w0.25: U2.39 101.75,81.561 103.439,83.25 106,83.25 107.363,84.613 107.363,86.863 J2.6
MCU_VCAP1: C13.2 U2.22 | length 1.4
  L1 (Signal) w0.25: U2.22@101.75,74 U2.22
  L1 (Signal) w0.3: C13.2 101.75,73.216 U2.22@101.75,74
USB_D_N: J1.2 U2.32 | length 11.4
  L1 (Signal) w0.26: U2.32 103.665,78.5 103.683,78.518 108.043,78.518 109.468,79.943 114.097,79.943 J1.2
USB_D_P: J1.3 U2.33 | length 11.4
  L1 (Signal) w0.26: U2.33 103.665,79 103.683,78.982 107.851,78.982 109.276,80.407 114.097,80.407 J1.3
VBUS: C1.2 FB1.1 J1.1
XTAL_IN: C6.2 R2.1 Y1.3 | length 2.6
  L1 (Signal) w0.2: Y1.3 92.7,74.2 C6.2 92.725,75.675 92.725,76.725 R2.1
pads on no net: J1.4 J1.6 J1.7 J1.8 J1.9 J1.10 J1.11 J2.MH J3. U2.2 U2.3 U2.4 U2.10 U2.11 U2.12 U2.13 U2.18 U2.19 U2.20 U2.21 U2.25 U2.27 U2.28 U2.29 U2.30 U2.31 U2.38 U2.40 U2.41 U2.46 U3.2 U3.3 U3.4 U3.5 U3.6 U3.7 U3.14 U3.15 U3.16 U3.17 U3.19 U3.21 U3.22

## Polygon pours and split planes (outlines as drawn)
GND on L1 (Signal) "GND_L01_P008" (solid, pour order 8): 109.75,75.5 109.5,75.25 109.5,73.5 110,73 110,71.5 111,70.5 111,69 111.5,68.5 113.5,68.5 114,68 114,67 114.25,66.75 115.75,66.75 116,67 116,69 115.75,69.25 114.25,69.25 114,69.5 113,70.5 113,71 112.75,72.75 112.5,75 112.5,75.25 112.25,75.5
+3V3 on L1 (Signal) "+3V3_L01_P002" (solid, pour order 2): 108.9,70.7 108.6,70.4 108.6,64.9 107.8,64.1 107.8,62.8 111.3,62.8 113.1,64.6 115.9,64.6 115.9,66.1 113.5,66.1 110.3,69.3 110.3,70.7
+5V on L1 (Signal) "+5V_L01_P001" (solid, pour order 1): 109.6,77.3 107.8,75.5 107.8,71.7 106.6,70.5 106.6,69.4 107.9,69.4 107.9,70.3 109,71.4 109.2,71.4 109.2,73.1 109.2,75.2 109.217,75.317 109.8,75.9 110.7,75.9 110.9,76.1 110.9,78.5 110.7,78.7 109.8,78.7 109.6,78.5
VBUS on L1 (Signal) "VBUS_L01_P000" (solid, pour order 0): 114.9,79.5 111.3,79.5 111.2,79.4 111.2,76.1 111.3,76 112.3,76 112.5,76.2 112.5,78.8 114.8,78.8 114.9,78.9
GND on L2 (GND) "GND_L02_P004" (solid, pour order 4): 86.13,62.051 86.13,92.051 cw(c87.13,92.051) 87.13,93.051 117.13,93.051 ccw(c118.13,93.051) 118.13,92.051 118.13,62.051 cw(c117.13,62.051) 117.13,61.051 87.13,61.051 ccw(c86.13,61.051)
GND on L3 (GND) "GND_L03_P005" (solid, pour order 5): 86.068,62 86.068,92 cw(c87.068,92) 87.068,93 117.068,93 ccw(c118.068,93) 118.068,92 118.068,62 cw(c117.068,62) 117.068,61 87.068,61 ccw(c86.068,61)

## Silkscreen, mask and mechanical layers (free items; w line width, h text height)
Top Overlay:
  text "TamisiRadu" at 112.1,92.5 h0.75 r315
  text "SWD" at 106.354,84.154 h1.25
  text "USB" at 114.654,74.454 h1.25
  text "GPIO" at 95.454,66.654 h1.25
Mechanical 1:
  lines w0.254: 85.25,61.52 ccw(c86.52,61.52) 86.52,60.25 117.48,60.25 ccw(c117.48,61.52) 118.75,61.52 118.75,92.48 ccw(c117.48,92.48) 117.48,93.75 86.52,93.75 ccw(c86.52,92.48) 85.25,92.48 85.25,92 85.25,61.52

## Text inside footprints (layer, text, board x,y; h text height)
D1: Mechanical 13 "+" at 116.577,63.282 h0.5 r90
D2: Mechanical 13 "+" at 103.617,76.008 h0.5